# EAGLE board keyboard_5keys_board_drc (EAGLE 7.1.0)
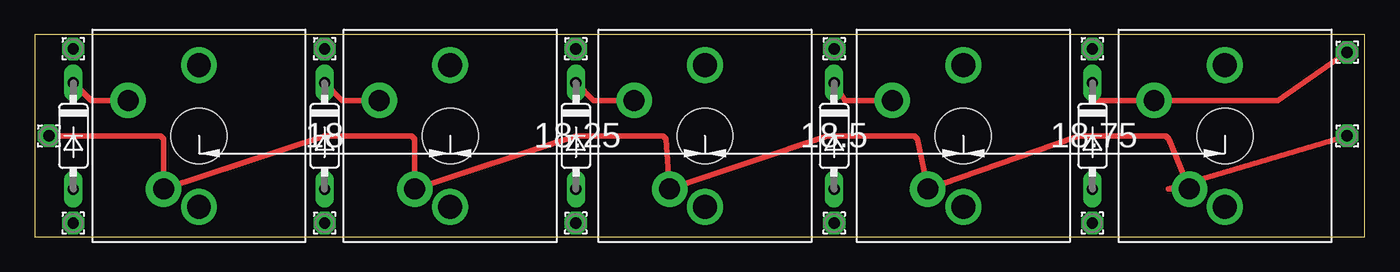
[diagram p0: board, top side]
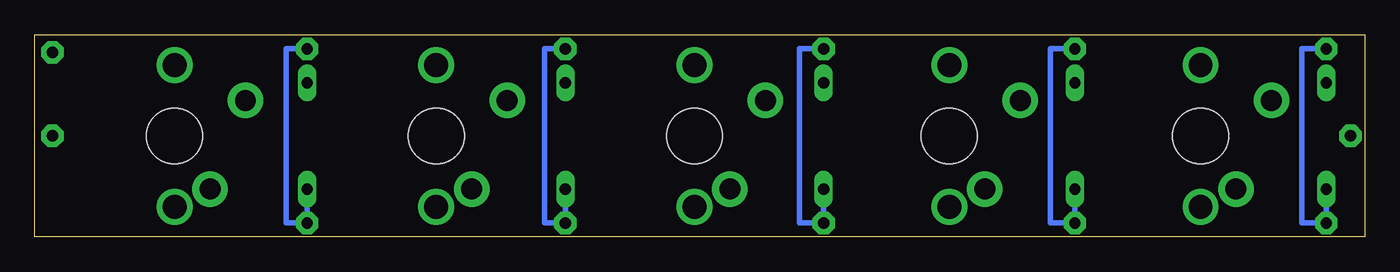
[diagram p1: board, bottom side, seen from below]

Size 95.25 x 14.5 mm. Coordinates in mm from the lower left corner, seen from the top.
Outline: 0,0 95.25,0 95.25,14.5 0,14.5 0,0
Copper layers (1*16): Top 0.035mm / dielectric 1.5mm / Bottom 0.035mm
Design rules "default": minimum track width 10mil, minimum drill 24mil, track to track 8mil, track to pad 8mil, pad to pad 8mil, via to via 8mil, smd to smd 8mil, copper to edge 40mil, drill to drill 8mil, minimum pad ring 10mil, minimum via ring 8mil, stop-mask expansion 4mil, vias tented up to drill 0mil, thermal gap 10mil

## Footprints (pad centres in the part's own frame; a part is rotated, then mirrored left to right if it is on the bottom)
DO35-7 = drill 0.813 long: A 3.81,0; C -3.81,0
CHERRY-MX = drill 1.714 pad 1.93: P$3 -5.08,0; P$4 5.08,0 | drill 1.5 pad 2.54: SW1 -3.81,2.54; SW2 2.54,5.08 | hole 4: 0,0
1,6/0,8 = drill 0.813 pad 1.6 octagon: 1 0,0

## Placement (x,y rotation side)
D1  1N4148DO35-7  [DO35-7]  75.75,7.25 270 top
D2  1N4148DO35-7  [DO35-7]  57.25,7.25 270 top
D3  1N4148DO35-7  [DO35-7]  38.75,7.25 270 top
D4  1N4148DO35-7  [DO35-7]  20.75,7.25 270 top
D5  1N4148DO35-7  [DO35-7]  2.75,7.25 270 top
SW1  CHERRY-MX  [CHERRY-MX]  85.25,7.25 90 top
SW2  CHERRY-MX  [CHERRY-MX]  66.5,7.25 90 top
SW3  CHERRY-MX  [CHERRY-MX]  48,7.25 90 top
SW4  CHERRY-MX  [CHERRY-MX]  29.75,7.25 90 top
SW5  CHERRY-MX  [CHERRY-MX]  11.75,7.25 90 top
XIN1  [1,6/0,8]  94,7.25 0 top
XOUT  [1,6/0,8]  1,7.25 0 top
XTRA1  [1,6/0,8]  94,13.25 0 top
YIN1  [1,6/0,8]  75.75,1 0 top
YIN2  [1,6/0,8]  57.25,1 0 top
YIN3  [1,6/0,8]  38.75,1 0 top
YIN4  [1,6/0,8]  20.75,1 0 top
YIN5  [1,6/0,8]  2.75,1 0 top
YOUT1  [1,6/0,8]  75.75,13.5 0 top
YOUT2  [1,6/0,8]  57.25,13.5 0 top
YOUT3  [1,6/0,8]  38.75,13.5 0 top
YOUT4  [1,6/0,8]  20.75,13.5 0 top
YOUT5  [1,6/0,8]  2.75,13.5 0 top

## Library data of the parts
D1-D5 = diode
SW1-SW5 = cherrymx
XIN1 XOUT XTRA1 YIN1-YIN5 YOUT1-YOUT5 = wirepad

## Nets
N$1: D3.A YIN3.1 YOUT3.1
N$2: D5.C SW5.SW2
N$3: D4.C SW4.SW2
N$4: D3.C SW3.SW2
N$5: D1.C SW1.SW2 XTRA1.1
N$6: D1.A YIN1.1 YOUT1.1
N$7: D2.A YIN2.1 YOUT2.1
N$8: D2.C SW2.SW2
N$9: D4.A YIN4.1 YOUT4.1
N$10: D5.A YIN5.1 YOUT5.1
XOUT: SW1.SW1 SW2.SW1 SW3.SW1 SW4.SW1 SW5.SW1 XIN1.1 XOUT.1

## Tracks (layer width: path | path; a pad name or v marks a point on that pad's centre or on a via)
N$1
  Bottom 0.406: YOUT3.1 40.5,13.5 40.5,1 YIN3.1 D3.A
N$2
  Top 0.406: D5.C 4.02,9.79 SW5.SW2
N$3
  Top 0.406: D4.C 22.02,9.79 SW4.SW2
N$4
  Top 0.406: D3.C 40.02,9.79 SW3.SW2
N$5
  Top 0.406: D1.C 76.02,9.79 SW1.SW2 89.04,9.79 XTRA1.1
N$6
  Bottom 0.406: YOUT1.1 77.25,13.5 77.25,1 YIN1.1 D1.A
N$7
  Bottom 0.406: YOUT2.1 58.75,13.5 58.75,1 YIN2.1 D2.A
N$8
  Top 0.406: D2.C 58.02,9.79 SW2.SW2
N$9
  Bottom 0.406: D4.A YIN4.1 22.5,1 22.5,13.5 YOUT4.1
N$10
  Bottom 0.406: YOUT5.1 4.5,13.5 4.5,1 YIN5.1 D5.A
XOUT
  Top 0.406: XOUT.1 9,7.25 9.21,7.04 SW5.SW1 20.77,7.25 27,7.25 27.21,7.04 SW4.SW1 38.77,7.25 45,7.25 45.21,7.04 SW3.SW1 56.77,7.25 63,7.25 63.21,7.04 SW2.SW1 74.77,7.25 81,7.25 81.21,7.04 SW1.SW1 81.19,3.44 XIN1.1